# Altium PCB PCB1.PcbDoc
Units mm, origin at the board's own origin, x right, y up, seen from the top; angles counter-clockwise.
Board outline 61.34 x 51.65 mm, 2 copper layers (Top Layer, Bottom Layer); 7 components, 6 nets, 17 pads, 0 vias.
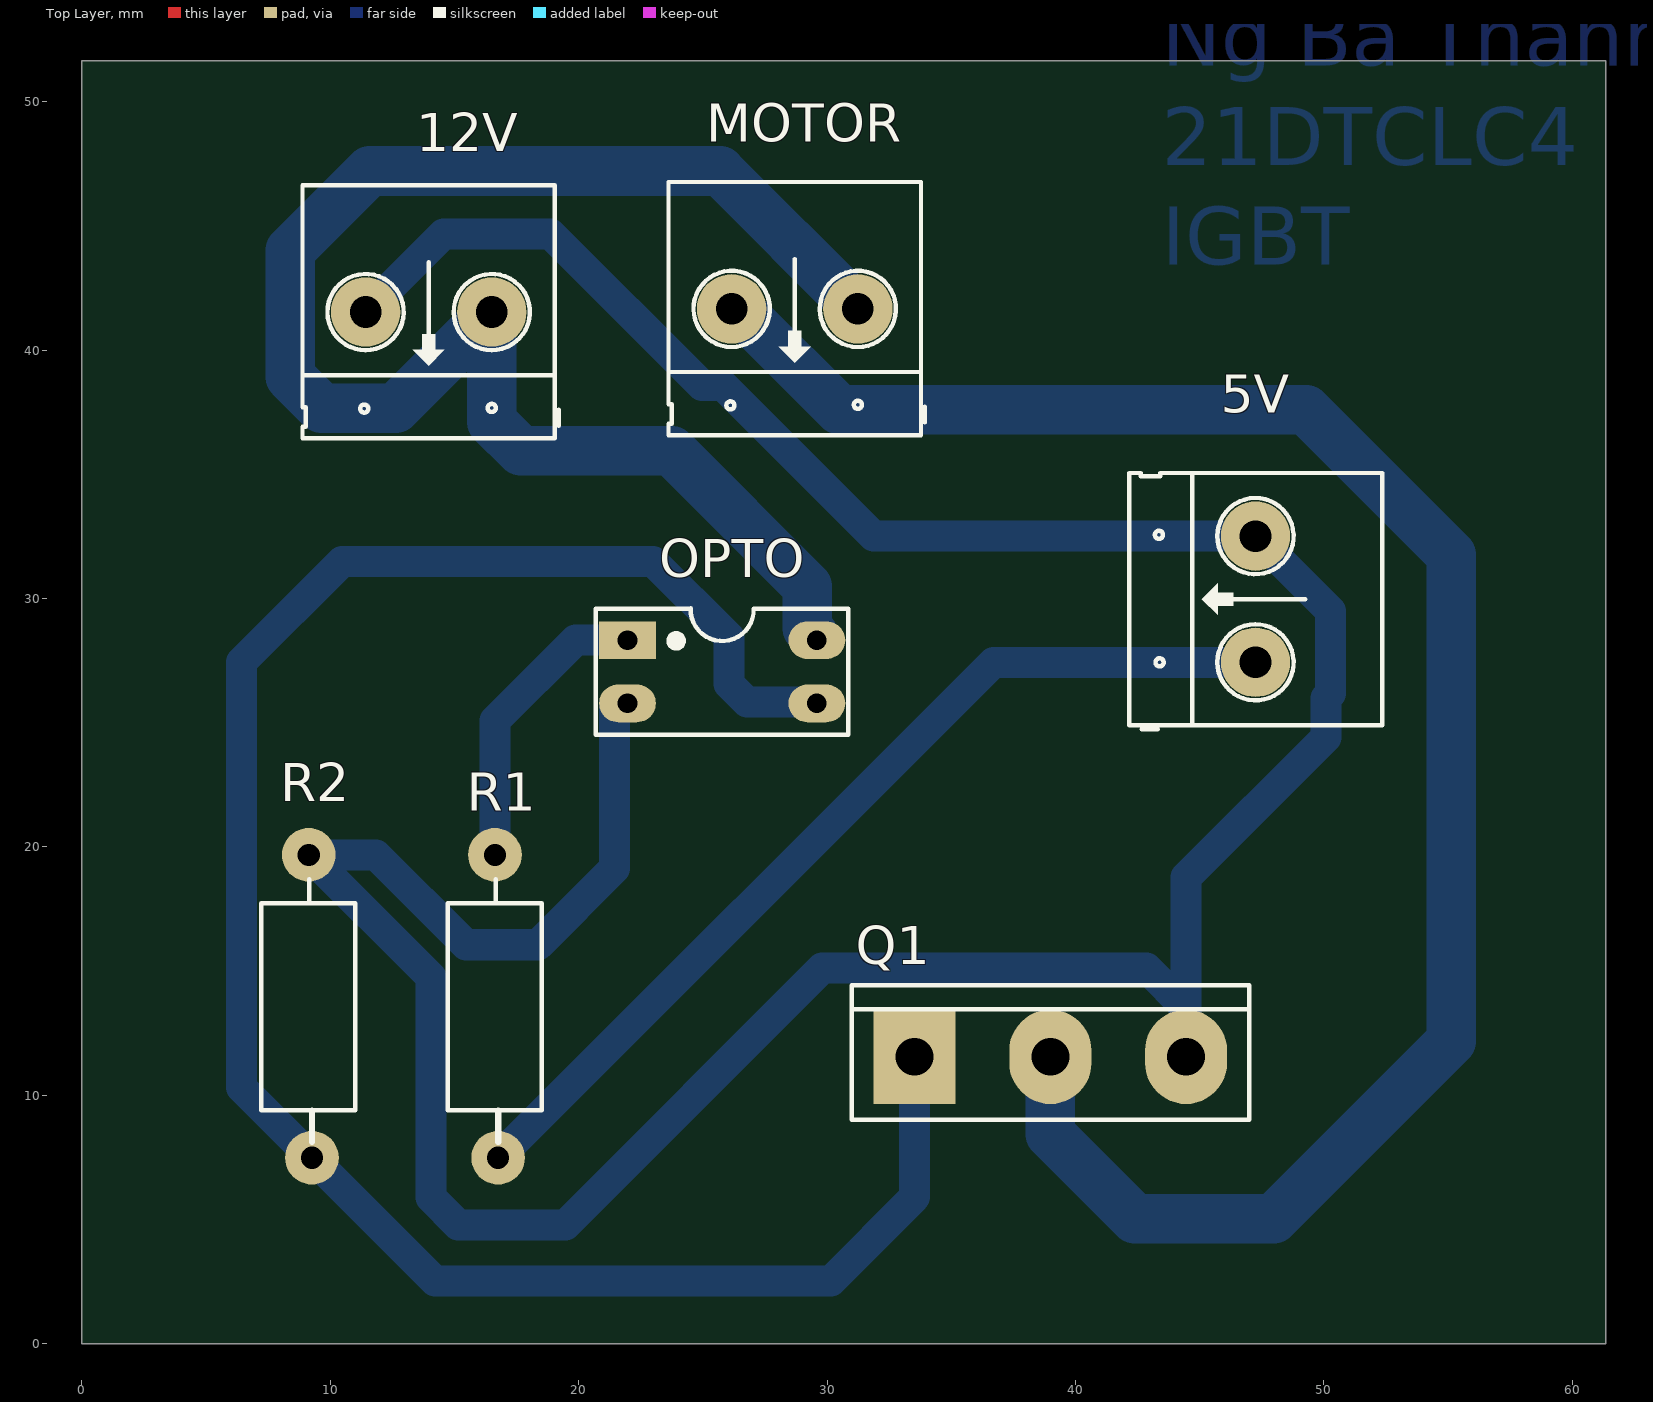
[diagram p0: Top Layer view]
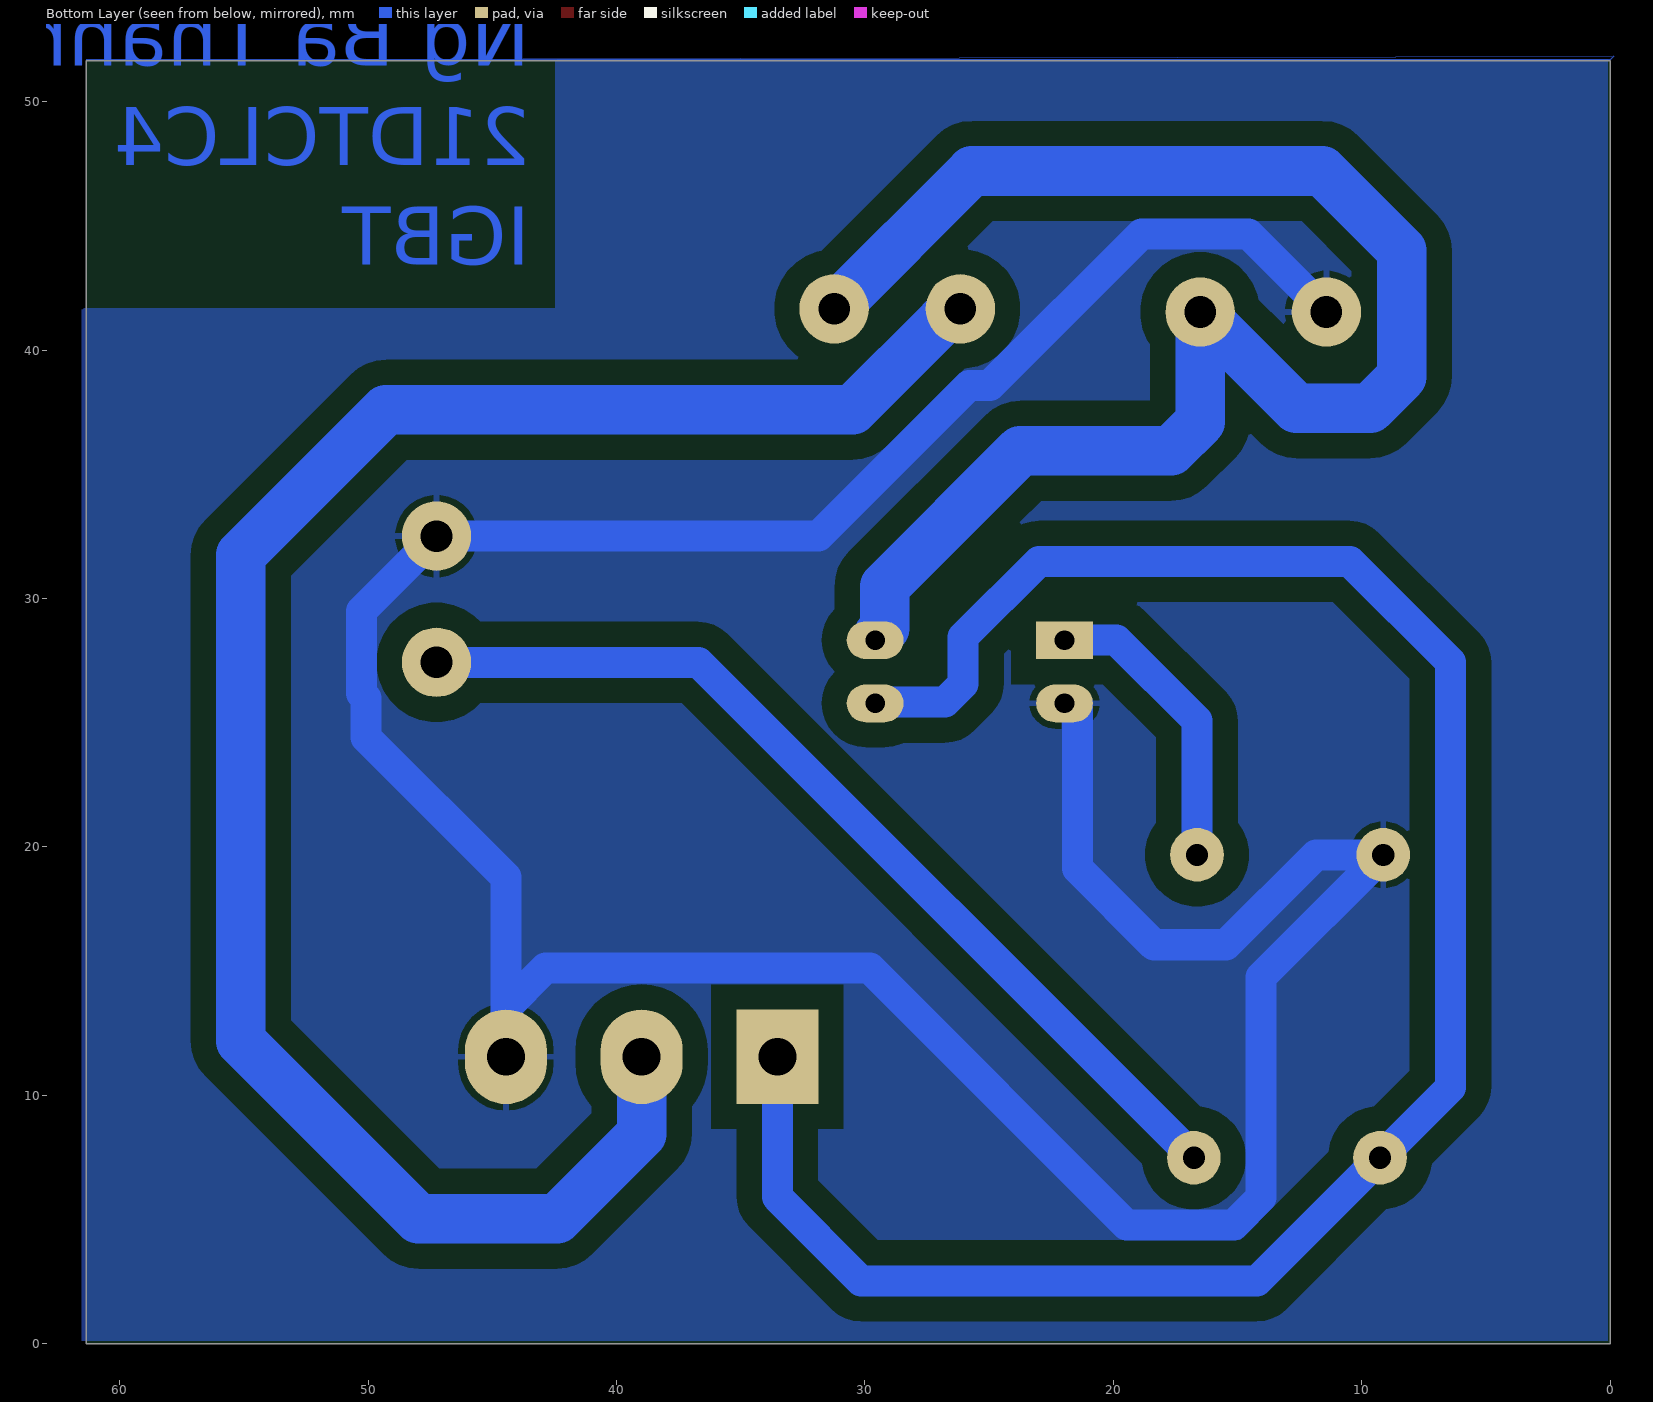
[diagram p1: Bottom Layer view, seen from below]
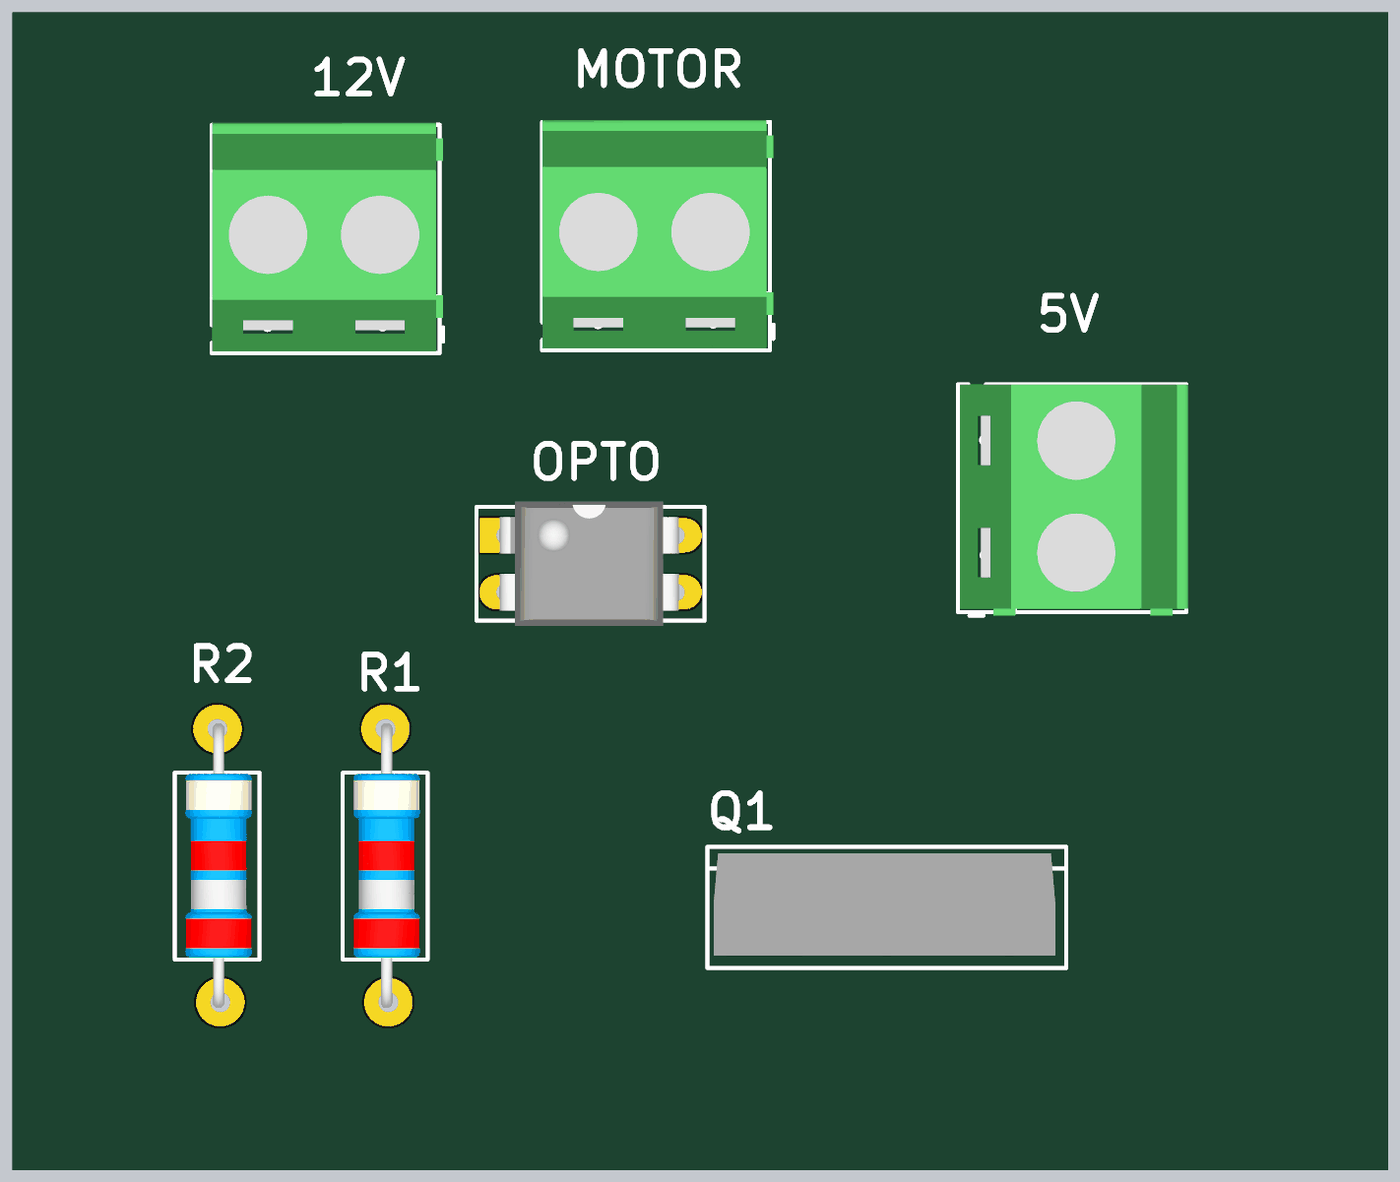
[diagram p2: 3D render of the assembled board from above, using the file's embedded part models]

## Layer stack, top to bottom
Top Solder: solder mask 0.0102, Solder Resist, Dk 3.5
Top Layer: signal copper 0.0356
Dielectric 1: dielectric 0.32, FR-4, Dk 4.8
Bottom Layer: signal copper 0.0356
Bottom Solder: solder mask 0.0102, Solder Resist, Dk 3.5

## Board outline
0,0 0,51.651 61.341,51.651 61.341,0

## Design rules (kind name [scope] priority, off if disabled: settings)
Clearance [All] p1: gap=1 ignorepadtopadclearanceinfootprint=FALSE
PolygonConnect [All] p1: connectstyle=Relief reliefconductorwidth=0.254 reliefentries=4 polygonreliefangle="90 Angle" airgapwidth=0.254
RoutingLayers [All] p1: top layer_v5=FALSE bottom layer_v5=TRUE
RoutingVias [All] p1: holewidth=0.711 width=1.27 viastyle="Through Hole" minholewidth=0.711 minwidth=1.27 maxholewidth=0.711 maxwidth=1.27
SolderMaskExpansion [All] p1: expansion=0.102 istentingtop=FALSE
Width [All] p1: maxlimit=2 minlimit=0.2 preferedwidth=1.25
29 further rules are at their usual default settings.

## Components (designator, comment, footprint, x,y, rotation, side; value= is the part's Value field where it differs from the comment)
5V "Header 2" HED2 47.244,27.432 r90 top
12V "Header 2" HED2 16.51,41.529 r180 top
MOTOR "Header 2" HED2 31.242,41.656 r180 top (schematic designator Motor)
OPTO "PC817" DIP4 21.971,28.321 r270 top
Q1 "D718" QTO-247 33.528,11.557 r0 top
R1 "180" RES-1/2W 16.637,13.081 r90 top
R2 "180" RES-1/2W 9.144,13.081 r90 top

## Footprints (in the part's own frame and the unit in brackets; to place one, negate y for a bottom-side part, rotate by r counter-clockwise, add the part's x,y. Pads: shape width x height; smd on the part's side, far side on the other; paste and mask are expansions set on the pad)
DIP4 [mil]
  rect 60x90 hole 31: 1(0,0)
  oval 60x90 hole 31: 2(100,0) 3(100,300) 4(0,300)
  silkscreen extent -50,-50 150,350, body extent -59,-10 159,305, height 170
HED2 [mil] "Header 2, 2 pin, hight 300mil, Pin to Pin 200, Colour Green"
  round 110 hole 50: 1(0,0) 2(200,0)
  silkscreen extent -106,-201 300,200, body extent -106,-205 300,197, height 560
QTO-247 [mil] "TO-247"
  rect 130x150 hole 60: 1(0,0)
  oval 130x150 hole 60: 2(215,0) 3(430,0)
  silkscreen extent -100,-100 530,113, body extent -89,-78 511,102, height 941
RES-1/2W [mil]
  round 85 hole 35: 1(-220,-5) 2(260,0)
  silkscreen extent -195,-74 221,75, body extent -230,-60 270,56, height 121

## Part data
5V 12V MOTOR: library part Hed2, "Header 2 (Green)"
OPTO: "Single Opto"
Q1: "Transistor Power Supply"
R1 R2: library part Res, "Res", Manufacturer="Generic Components", Class=Passive, Published=08/06/2000, Publisher="Altium Hobart Technology Centre", SubClass=R

## Nets (pads, with @x,y where several pads share a name; then routed paths per layer and width w, separated by ;. In a path a pad name is that pad's centre, name@x,y a point inside that pad or via, vN(x,y) a via of type N, cw(c..) or ccw(c..) an arc to the next point about the centre after c; other vN are vias at no path point)
GND: 5V.2 12V.2 OPTO.2 Q1.3 R2.2 | length 140.6
  Bottom Layer w1.25: 12V.2 14.573,44.672 18.873,44.672 24.978,38.566 25.816,38.566 31.87,32.512 5V.2 50.266,29.49 50.266,26.18 50.08,25.994 50.08,24.413 44.45,18.783 44.45,13.525 ; OPTO.2 21.44,25.781 21.44,19.128 18.377,16.066 15.471,16.066 11.851,19.685 R2.2 14.059,14.77 14.059,5.887 15.158,4.788 19.469,4.788 29.806,15.126 42.85,15.126 44.45,13.525 ; Q1.3 44.45,13.525
Net5V_1: 5V.1 R1.1 | length 38.7
  Bottom Layer w1.25: R1.1 36.703,27.432 5V.1
Net12V_1: 12V.1 MOTOR.1 OPTO.4 | length 63.7
  Bottom Layer w2: OPTO.4@29.448,28.559 29.21,28.797 29.21,30.48 23.749,35.941 17.682,35.941 16.51,37.113 12V.1 12.636,37.655 9.665,37.655 8.395,38.925 8.395,44.005 11.595,47.206 25.692,47.206 MOTOR.1
NetMotor_2: MOTOR.2 Q1.2 | length 76.2
  Bottom Layer w2: MOTOR.2 26.377,41.656 26.842,41.191 26.903,41.191 30.502,37.592 49.276,37.592 55.118,31.75 55.118,12.192 47.968,5.042 42.393,5.042 38.989,8.445 Q1.2
NetOPTO_1: OPTO.1 R1.2 | length 12.1
  Bottom Layer w1.25: R1.2 16.637,25.082 19.875,28.321 OPTO.1
NetOPTO_3: OPTO.3 Q1.1 R2.1 | length 82.8
  Bottom Layer w1.25: OPTO.3 29.539,25.833 26.78,25.833 26.048,26.566 26.048,28.447 22.999,31.496 10.49,31.496 6.439,27.445 6.439,10.325 14.226,2.538 30.161,2.538 33.528,5.905 Q1.1

## Polygon pours and split planes (outlines as drawn)
GND on Bottom Layer "GND_L02_P000" (solid, pour order 0): 0.105,0.127 0.105,51.689 61.236,51.689 61.528,51.397 61.528,0.127
no net on Bottom Layer "NONET_L02_P001" (solid, pour order 1): -0.127,51.816 0,51.689 61.341,51.689

## Other copper
Bottom Layer:
  text "Ng Bá Thành / 21DTCLC4 / IGBT" at 43.464,42.672 h4